# Altium PCB keycontrol.PcbDoc
Units mil, origin at the board's own origin, x right, y up, seen from the top; angles counter-clockwise.
Board outline 5505 x 5380 mil, 2 copper layers (Top Layer, Bottom Layer); 147 components, 95 nets, 404 pads, 100 vias.
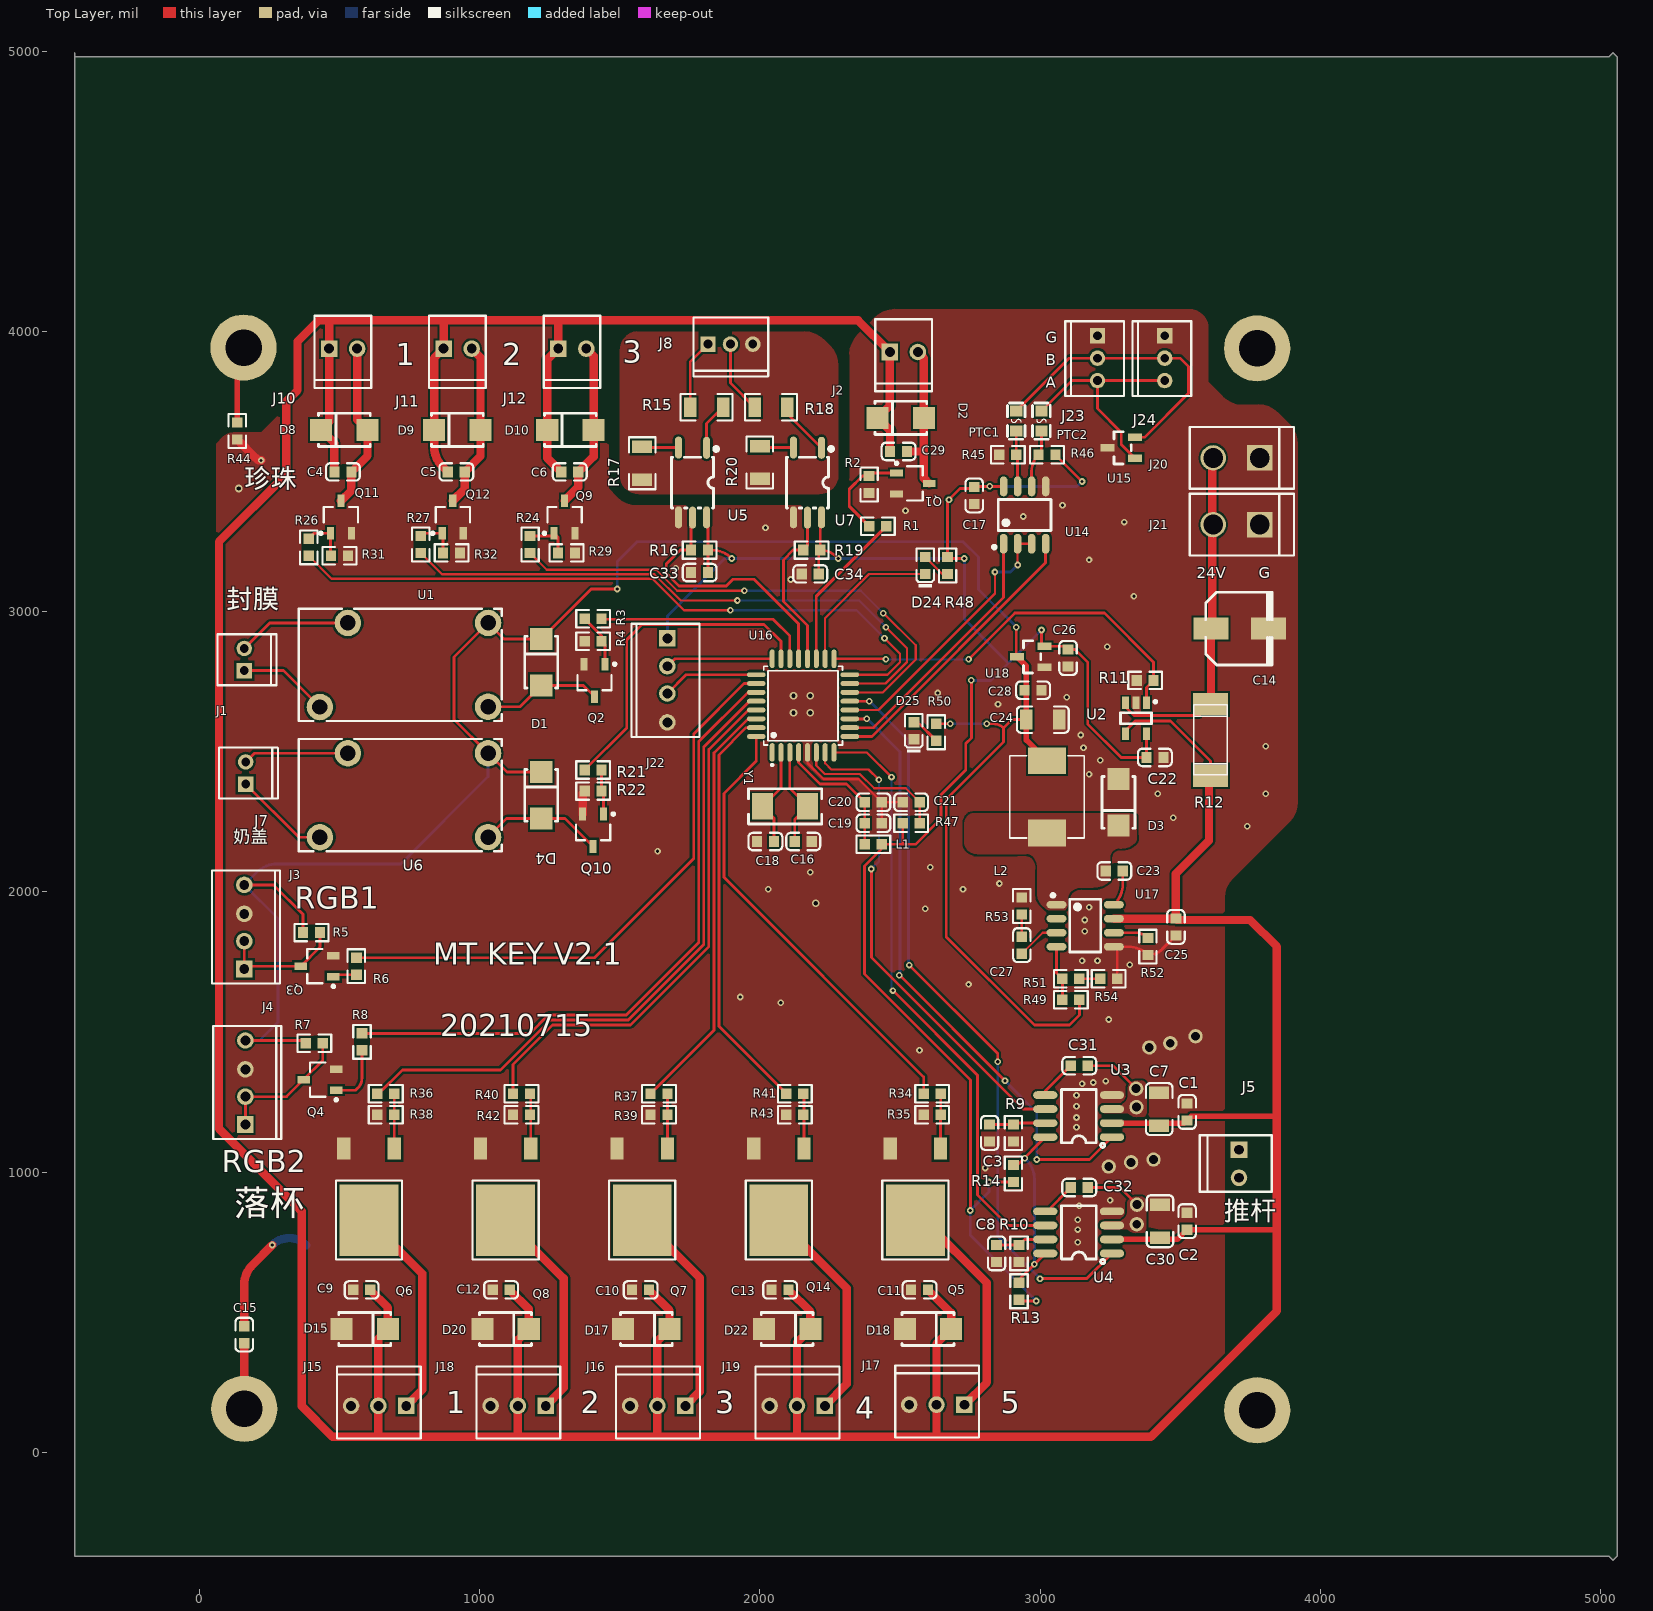
[diagram p0: Top Layer view]
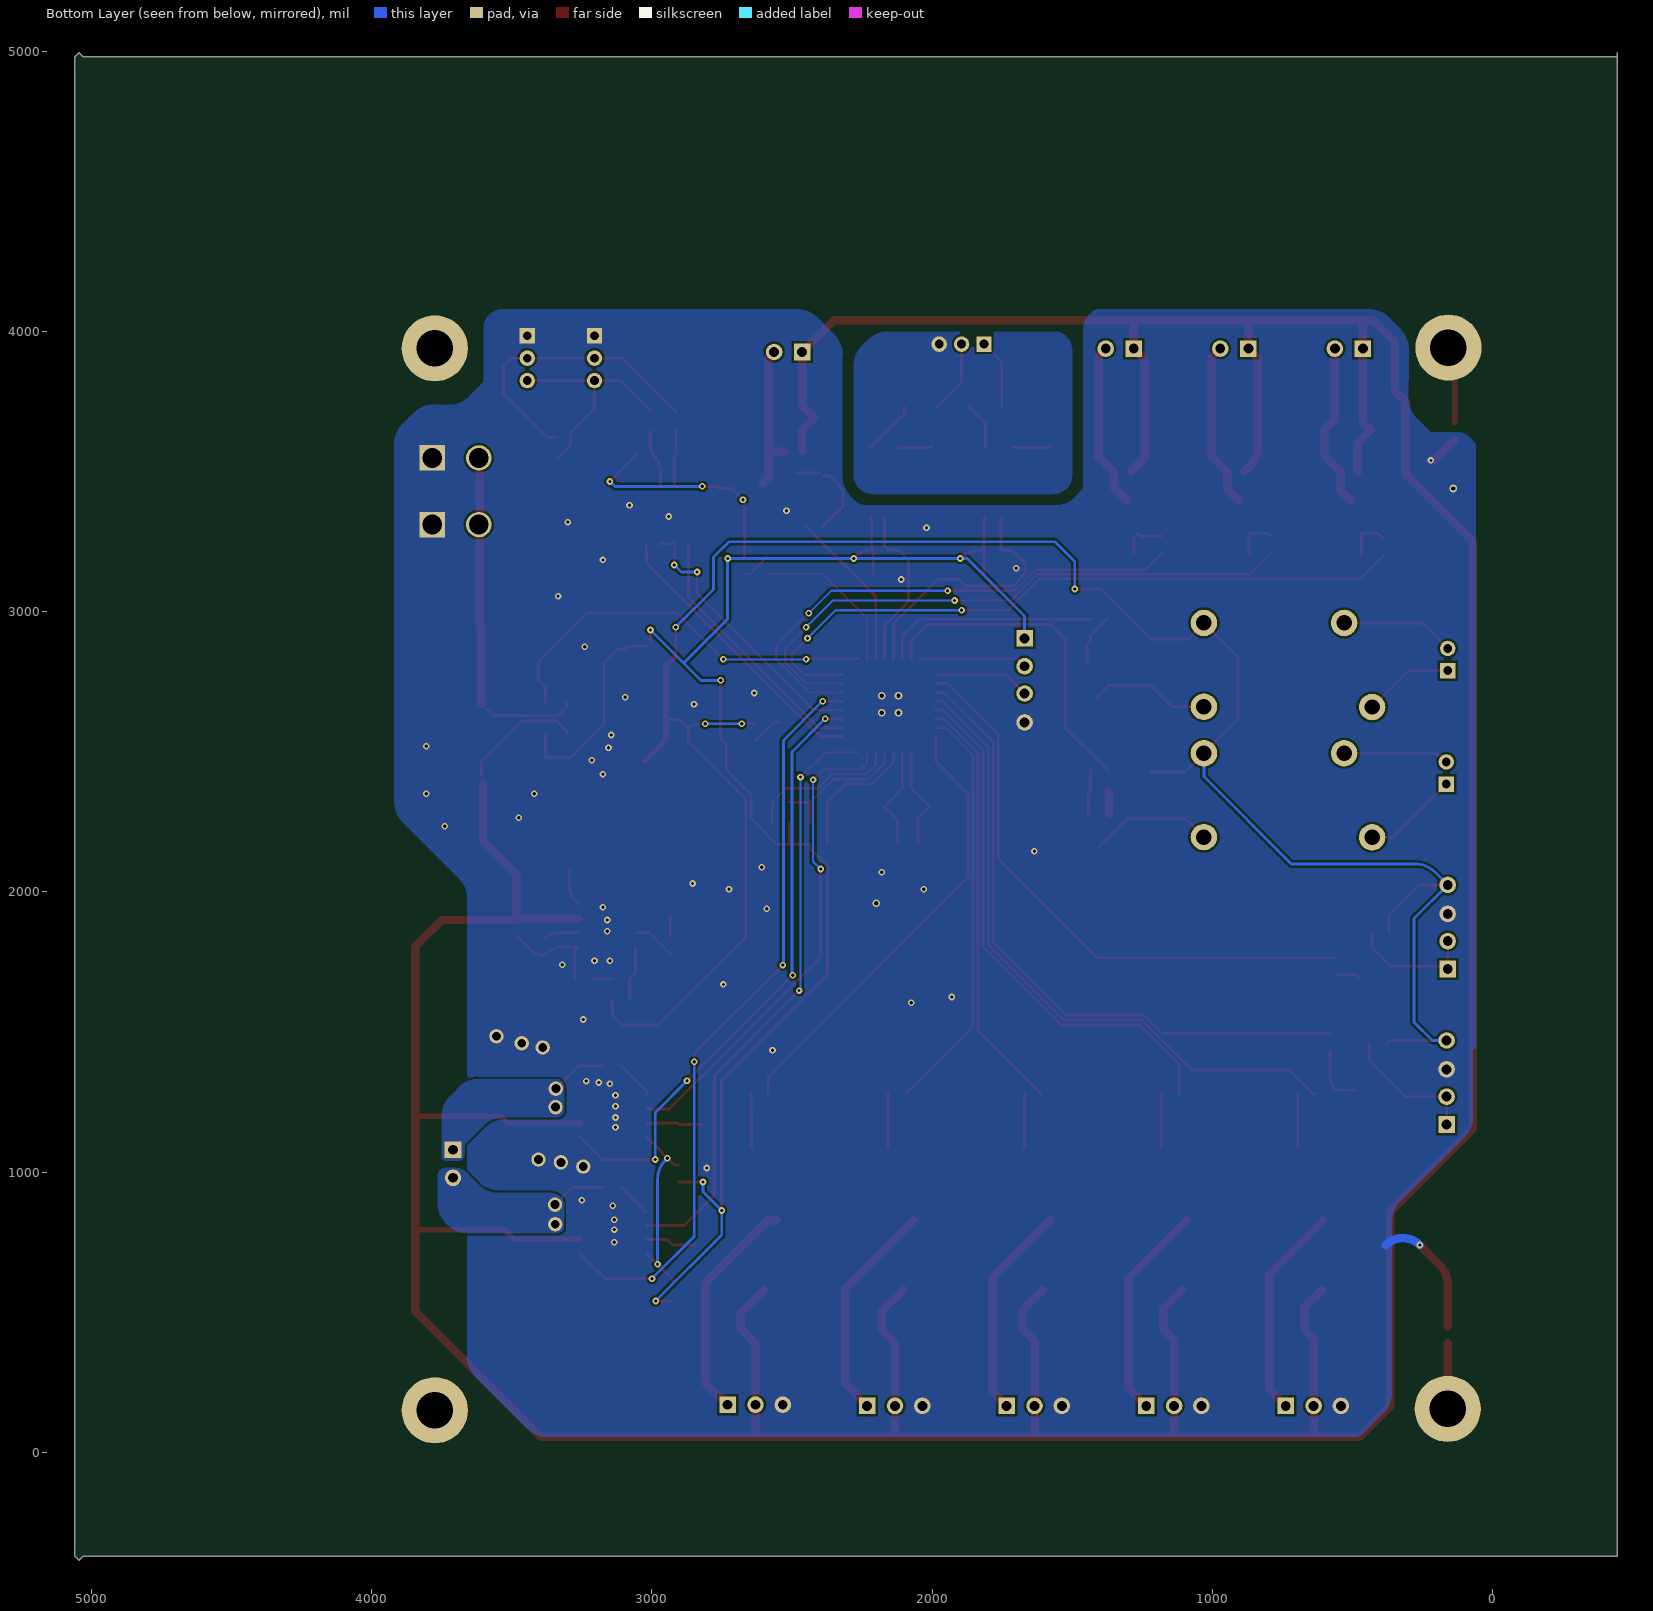
[diagram p1: Bottom Layer view, seen from below]
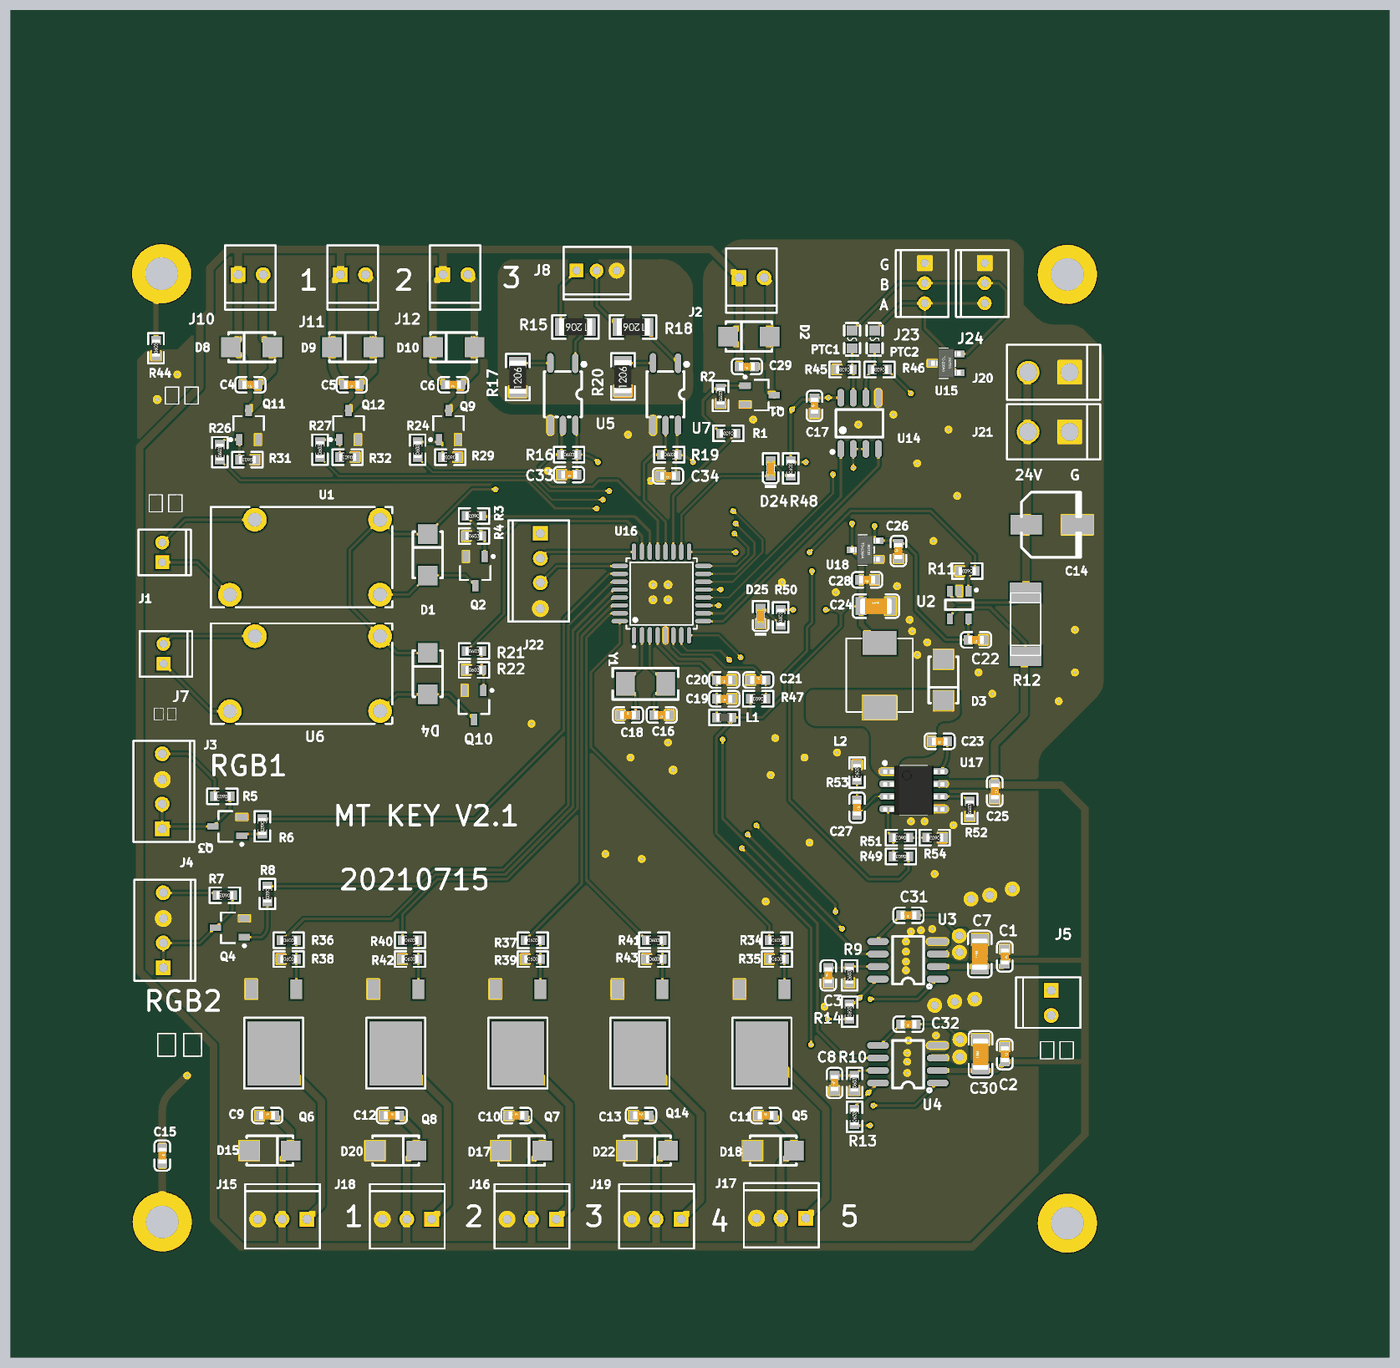
[diagram p2: 3D render of the assembled board from above, using the file's embedded part models]

## Layer stack, top to bottom
Top Layer: signal copper 1.4
Dielectric: dielectric 12.6, FR-4, Dk 4.8
Bottom Layer: signal copper 1.4

## Board outline
-445,4995 -445,-370 5030,-370 5045,-385 5060,-370 5060,4490 5060,4980 5045,4995 5030,4980 -445,4980

## Design rules (kind name [scope] priority, off if disabled: settings)
Clearance [All] p1: gap=8
PolygonConnect [All] p1: connectstyle=Direct reliefconductorwidth=10 reliefentries=4 polygonreliefangle="90 Angle"
RoutingVias [All] p1: holewidth=28 width=50 viastyle="Through Hole" minholewidth=11.81 minwidth=23.62 maxholewidth=11.81 maxwidth=23.62
SilkscreenOverComponentPads [All] p1: minsilkscreentomaskgap=10
SolderMaskExpansion [All] p1: expansion=4
Width [All] p1: maxlimit=50 minlimit=8 preferedwidth=10
27 further rules are at their usual default settings.

## Classes and differential pairs
component class keycontrol2: C1 C2 C3 C7 C8 C30 C31 C32 J5 R9 R10 R13 R14 U3 U4
component class keycontrol: C4 C5 C6 C9 C10 C11 C12 C13 D8 D9 D10 D15 D17 D18 D20 D22 J10 J11 J12 J15 J16 J17 J18 J19 Q5 Q6 Q7 Q8 Q9 Q11 Q12 Q14 R24 R26 R27 R29 R31 R32 R34 R35 R36 R37 R38 R39 R40 R41 R42 R43
component class keycontrol_MCU: C14 C15 C16 C17 C18 C19 C20 C21 C22 C23 C24 C25 C26 C27 C28 D3 D24 D25 J20 J21 J22 J23 J24 L1 L2 PTC1 PTC2 R11 R12 R44 R45 R46 R47 R48 R49 R50 R51 R52 R53 R54 U2 U14 U15 U16 U17 U18 Y1
component class keycontrol1: C29 C33 C34 D1 D2 D4 J1 J2 J3 J4 J7 J8 Q1 Q2 Q3 Q4 Q10 R1 R2 R3 R4 R5 R6 R7 R8 R15 R16 R17 R18 R19 R20 R21 R22 U1 U5 U6 U7

## Components (designator, comment, footprint, x,y, rotation, side; value= is the part's Value field where it differs from the comment)
C1 "100nF (104) 10% 50V" 0603_C 3525,1215 r270 top
C2 "100nF (104) 10% 50V" 0603_C 3525,825 r270 top
C3 "1uF (105) 10% 50V" 0603_C 2820,1140 r90 top
C4 "100nF (104) 10% 50V" 0603_C 512,3499 r180 top
C5 "100nF (104) 10% 50V" 0603_C 916.75,3499 r180 top
C6 "100nF (104) 10% 50V" 0603_C 1321.5,3499 r180 top
C7 "10uF (106) 10% 50V" 1206_C 3425,1225 r90 top
C8 "1uF (105) 10% 50V" 0603_C 2845,710 r90 top
C9 "100nF (104) 10% 50V" 0603_C 579,580 r0 top
C10 "100nF (104) 10% 50V" 0603_C 1574.5,580 r0 top
C11 "100nF (104) 10% 50V" 0603_C 2570,580 r0 top
C12 "100nF (104) 10% 50V" 0603_C 1076.75,580 r0 top
C13 "100nF (104) 10% 50V" 0603_C 2072.25,580 r0 top
C14 "100uf" E_6.3*5.4 3610,2940 r0 top
C15 "100nF" 0603_C 160,420 r270 top
C16 "22pF" 0603_C 2155,2180 r180 top
C17 "100nF (104) 10% 50V" 0603_C 2765,3415 r90 top
C18 "22pF" 0603_C 2020,2180 r0 top
C19 "10uF" 0603_C 2405,2245 r180 top
C20 "100nF" 0603_C 2405,2320 r180 top
C21 "10nF" 0603_C 2540,2320 r0 top
C22 "100nF (104) 10% 50V" 0603_C 3410,2480 r180 top
C23 "100nF" 0603_C 3265,2075 r180 top
C24 "22u/25V" 1206_C 3010,2615 r0 top
C25 "1uF  50V" 0603_C 3485,1875 r270 top
C26 "100nF" 0603_C 3100,2835 r90 top
C27 "220pF" 0603_C 2935,1810 r270 top
C28 "10uF" 0603_C 2975,2720 r180 top
C29 "100nF (104) 10% 50V" 0603_C 2495,3572 r180 top
C30 "10uF (106) 10% 50V" 1206_C 3428,825 r90 top
C31 "100nF (104) 10% 50V" 0603_C 3140,1380 r180 top
C32 "100nF (104) 10% 50V" 0603_C 3140,945 r180 top
C33 "100nF (104) 10% 50V" 0603_C 1785,3140 r180 top
C34 "100nF (104) 10% 50V" 0603_C 2180,3135 r180 top
D1 "SS54" SMA(DO-214AC)_S1 1220,2820 r270 top
D2 "SS54" SMA(DO-214AC)_S1 2503,3692 r0 top
D3 "SS54" SMA(DO-214AC)_S1 3280,2320 r90 top
D4 "SS54" SMA(DO-214AC)_S1 1220,2345 r270 top
D8 "SS54" SMA(DO-214AC)_S1 517,3649 r0 top
D9 "SS54" SMA(DO-214AC)_S1 920.5,3649 r0 top
D10 "SS54" SMA(DO-214AC)_S1 1324,3649 r0 top
D15 "SS54" SMA(DO-214AC)_S1 590,440 r180 top
D17 "SS54" SMA(DO-214AC)_S1 1595,440 r180 top
D18 "SS54" SMA(DO-214AC)_S1 2600,440 r180 top
D20 "SS54" SMA(DO-214AC)_S1 1092.5,440 r180 top
D22 "SS54" SMA(DO-214AC)_S1 2097.5,440 r180 top
D24 "绿灯 0603" 0603_LED_S1 2590,3165 r90 top
D25 "红灯 0603" 0603_LED_S1 2549.68,2575 r90 top
J1 "MOTOR" PH2-2.0 160,2790 r90 top
J2 "MOTOR" XH-2P 2464,3927 r0 top
J3 "header4" xh-4 160,1725 r90 top
J4 "header4" xh-4 164,1170 r90 top
J5 "MOTOR" XH-2P 3710,1080 r270 top
J7 "MOTOR" PH2-2.0 165,2385 r90 top
J8 "PH-3" ph3-2.0 1815,3955 r0 top
J10 "MOTOR" XH-2P 463,3939 r0 top
J11 "MOTOR" XH-2P 871.75,3939 r0 top
J12 "MOTOR" XH-2P 1280.5,3939 r0 top
J15 "header3p" XH-3 738,166 r180 top
J16 "header3p" XH-3 1734,166 r180 top
J17 "header3p" XH-3 2730,170 r180 top
J18 "header3p" XH-3 1236,166 r180 top
J19 "header3p" XH-3 2232,166 r180 top
J20 "MOTOR" 5557_a 3784,3549 r180 top
J21 "MOTOR" 5557_a 3784,3311 r180 top
J22 "header4" xh-4 1670,2905 r270 top
J23 "PH-3" ph3-2.0 3205,3985 r270 top
J24 "PH-3" ph3-2.0 3445,3985 r270 top
L1 "10nH ±5%" 0603_L 2405,2170 r180 top
L2 "15uH" LSMD,3.3*6.6*3mm 3025,2210 r90 top
PTC1 "PTC" PTC 2915,3645 r90 top
PTC2 "PTC" PTC 3005,3645 r90 top
Q1 "AO3400A N道沟 X0YV1T SOT-23" SOT-23-3L 2546,3458 r180 top
Q2 "AO3400A N" SOT-23-3L 1410,2755 r90 top
Q3 "AO3400A N道沟 X0YV1T SOT-23" SOT-23-3L 420,1735 r0 top
Q4 "AO3400A N道沟 X0YV1T SOT-23" SOT-23-3L 430,1330 r0 top
Q5 "MOSFET_N" TO-252-2 2645,1085 r180 top
Q6 "MOSFET_N" TO-252-2 695,1085 r180 top
Q7 "MOSFET_N" TO-252-2 1670,1085 r180 top
Q8 "MOSFET_N" TO-252-2 1182.5,1085 r180 top
Q9 "AO3400A N道沟 X0YV1T SOT-23" SOT-23-3L 1303.29,3338 r270 top
Q10 "AO3400A N" SOT-23-3L 1405,2220 r90 top
Q11 "AO3400A N道沟 X0YV1T SOT-23" SOT-23-3L 505,3338 r270 top
Q12 "AO3400A N道沟 X0YV1T SOT-23" SOT-23-3L 904.14,3338 r270 top
Q14 "MOSFET_N" TO-252-2 2157.5,1085 r180 top
R1 "33Ω (33R0) ±1%" 0603_R 2421,3305 r180 top
R2 "4.7KΩ (4701) ±1%" 0603_R 2390,3454 r90 top
R3 "33Ω (33R0) ±1%" 0603_R 1405,2975 r180 top
R4 "10KΩ (1002) ±1%" 0603_R 1405,2895 r0 top
R5 "470Ω (4700) ±1%" 0603_R 400,1855 r180 top
R6 "27Ω (27R0) ±1%" 0603_R 560,1735 r270 top
R7 "470Ω (4700) ±1%" 0603_R 410,1460 r180 top
R8 "27Ω (27R0) ±1%" 0603_R 580,1465 r270 top
R9 "27KΩ (2702) ±1%" 0603_R 2905,1140 r90 top
R10 "27KΩ (2702) ±1%" 0603_R 2925,710 r90 top
R11 "68KΩ (6802) ±1%" 0603_R 3375,2755 r180 top
R12 "R005/2W" 2512 3625,2605 r270 top
R13 "4.7KΩ (4701) ±1%" 0603_R 2925,575 r90 top
R14 "4.7KΩ (4701) ±1%" 0603_R 2905,995 r90 top
R15 "1KΩ (1001) ±1%" 1206_R 1810,3730 r180 top
R16 "330Ω (3300) ±1%" 0603_R 1785,3220 r0 top
R17 "1KΩ (1001) ±1%" 1206_R 1580,3530 r90 top
R18 "1KΩ (1001) ±1%" 1206_R 2040,3730 r180 top
R19 "330Ω (3300) ±1%" 0603_R 2185,3220 r0 top
R20 "1KΩ (1001) ±1%" 1206_R 2000,3532.71 r90 top
R21 "33Ω (33R0) ±1%" 0603_R 1405,2435 r0 top
R22 "10KΩ (1002) ±1%" 0603_R 1405,2360 r0 top
R24 "33Ω (33R0) ±1%" 0603_R 1180,3240 r90 top
R26 "33Ω (33R0) ±1%" 0603_R 390,3230 r90 top
R27 "33Ω (33R0) ±1%" 0603_R 790,3240 r90 top
R29 "4.7KΩ (4701) ±1%" 0603_R 1310,3210 r180 top
R31 "4.7KΩ (4701) ±1%" 0603_R 500,3200 r180 top
R32 "4.7KΩ (4701) ±1%" 0603_R 900,3210 r180 top
R34 "33Ω (33R0) ±1%" 0603_R 2615,1280 r0 top
R35 "10KΩ (1002) ±1%" 0603_R 2615,1205 r0 top
R36 "33Ω (33R0) ±1%" 0603_R 665,1280 r0 top
R37 "33Ω (33R0) ±1%" 0603_R 1640,1280 r0 top
R38 "10KΩ (1002) ±1%" 0603_R 665,1205 r0 top
R39 "10KΩ (1002) ±1%" 0603_R 1640,1205 r0 top
R40 "33Ω (33R0) ±1%" 0603_R 1149.68,1280 r0 top
R41 "33Ω (33R0) ±1%" 0603_R 2125,1280 r0 top
R42 "10KΩ (1002) ±1%" 0603_R 1149.68,1205 r0 top
R43 "10KΩ (1002) ±1%" 0603_R 2125,1205 r0 top
R44 "1MΩ (1004) ±1%" 0603_R 135,3645 r90 top
R45 "4.7KΩ (4701) ±1%" 0603_R 2885,3560 r180 top
R46 "4.7KΩ (4701) ±1%" 0603_R 3025,3560 r180 top
R47 "10KΩ" 0603_R 2540,2245 r180 top
R48 "1KΩ" 0603_R 2670,3165 r90 top
R49 "120KΩ" 0603_R 3110,1615 r180 top
R50 "10KΩ" 0603_R 2629.68,2570 r90 top
R51 "22KΩ" 0603_R 3110,1690 r180 top
R52 "120KΩ" 0603_R 3385,1805 r90 top
R53 "120KΩ (1203) ±1%" 0603_R 2935,1950 r90 top
R54 "470Ω" 0603_R 3245,1690 r180 top
U1 "HF32F/005-HS" HF32F/005-HS 1030,2960 r180 top
U2 "INA138" SOT-23-5 3380,2675 r90 top
U3 "MP8040" SOIC-8_150mil#1 3155,1180 r180 top
U4 "MP8040" SOIC-8_150mil#1 3155,765 r180 top
U5 "TLP2362" SO-5 1810,3585 r270 top
U6 "HF32F/005-HS" HF32F/005-HS 1030,2495 r180 top
U7 "TLP2362" SO-5 2220,3585 r270 top
U14 "SP3485EN-L/TR" SOIC-8_150mil#2 2945,3345 r0 top
U15 "PESD3V3L2BT" SOT-23(SOT-23-3) 3290,3585 r0 top
U16 "STM32G030K8T6" LQFP-32 2044,2498 r0 top
U17 "MP2560D" SOP-8_150mil 3175,1915 r270 top
U18 "MCP1700T-3302E/TT" SOT-23-3 2995,2840 r0 top
Y1 "8MHz" SMD-5032_2P 2090,2305 r0 top

## Footprints (in the part's own frame and the unit in brackets; to place one, negate y for a bottom-side part, rotate by r counter-clockwise, add the part's x,y. Pads: shape width x height; smd on the part's side, far side on the other; paste and mask are expansions set on the pad)
0603_C [mm]
  rect 0.93x0.98 smd: 1(-0.77,0) 2(0.77,0)
  silkscreen extent -1.53,-0.79 1.54,0.79, body extent -0.8,-0.4 0.8,0.4, height 0.3
0603_L [mm]
  rect 0.93x0.98 smd: 1(-0.77,0) 2(0.77,0)
  silkscreen extent -1.53,-0.79 1.54,0.79, body extent -0.82,-0.41 0.83,0.41, height 0.46
0603_LED_S1 [mm]
  rect 0.93x0.98 smd: A(0.77,0) K(-0.77,0)
  silkscreen extent -1.98,-0.79 1.54,0.79, body extent -0.8,-0.4 0.8,0.4, height 0.6
0603_R [mm]
  rect 0.93x0.98 smd: 1(-0.77,0) 2(0.77,0)
  silkscreen extent -1.53,-0.79 1.54,0.79, body extent -0.85,-0.4 0.85,0.4, height 0.56
1206_C [mm]
  rect 1.13x1.8 smd: 1(-1.49,0) 2(1.49,0)
  silkscreen extent -2.36,-1.2 2.35,1.2, body extent -1.6,-0.81 1.6,0.79, height 1
1206_R [mm]
  rect 1.13x1.8 smd: 1(-1.49,0) 2(1.49,0)
  silkscreen extent -2.36,-1.2 2.35,1.2, body extent -1.7,-0.86 1.65,0.87, height 0.85
2512 [mil]
  rect 78.7x126 smd: 1(-65.65,-17) 2(190.35,-17)
  silkscreen extent -63,-77 187,43
5557_a [mm]
  rect 2.3x2.3 hole 1.8: 1(0,0)
  round 2.3 hole 1.8: 2(4.216,0)
  silkscreen extent -3.1,-2.79 6.35,2.79
E_6.3*5.4 [mm]
  rect 3.2x2 smd: 1(0,0) 2(5.207,0)
  silkscreen extent -0.47,-3.3 5.53,3.3
HF32F/005-HS [mil]
  round 94.49 hole 55.12: 1(0,0) 2(0,299.2) 3(600,300) 4(500,0)
  silkscreen extent -49,-51 676,350
LQFP-32 [mm]
  oval 0.448x1.684 smd: 1(0,0) 2(0.8,0) 3(1.6,0) 4(2.4,0) 5(3.2,0) 6(4,0) 7(4.8,0) 8(5.6,0) 17(5.6,8.484) 18(4.8,8.484) 19(4,8.484) 20(3.2,8.484) 21(2.4,8.484) 22(1.6,8.484) 23(0.8,8.484) 24(0,8.484)
  oval 1.684x0.448 smd: 9(7.042,1.442) 10(7.042,2.242) 11(7.042,3.042) 12(7.042,3.842) 13(7.042,4.642) 14(7.042,5.442) 15(7.042,6.242) 16(7.042,7.042) 25(-1.442,7.042) 26(-1.442,6.242) 27(-1.442,5.442) 28(-1.442,4.642) 29(-1.442,3.842) 30(-1.442,3.042) 31(-1.442,2.242) 32(-1.442,1.442)
  silkscreen extent -0.78,-1.24 6.38,7.82
LSMD,3.3*6.6*3mm [mm]
  rect 2.424x3.42 smd: 1(0,0) 2(6.556,0)
  silkscreen extent -0.45,-3.38 7,3.38
PH2-2.0 [mm]
  rect 1.4x1.4 hole 0.8: 1(0,0)
  round 1.4 hole 0.8: 2(2.007,0)
  silkscreen extent -1.32,-2.92 3.3,2.41
ph3-2.0 [mm]
  rect 1.4x1.4 hole 0.8: 1(0,0)
  round 1.4 hole 0.8: 2(2.032,0) 3(4.064,0)
  silkscreen extent -1.32,-2.92 5.46,2.41
PTC [mm]
  rect 1x1.1 smd: 1(0,0) 2(1.8,0)
  silkscreen extent -0.75,-0.8 2.55,0.8
SMA(DO-214AC)_S1 [mm]
  rect 2x2 smd: 1(2.1,0) 2(-2.1,0)
  silkscreen extent -2.35,-1.5 2.35,1.5
SMD-5032_2P [mm]
  rect 1.9x2.4 smd: 1(-2.05,0) 2(2.05,0)
  silkscreen extent -3.32,-1.6 3.32,1.6
SO-5 [mm]
  oval 2x0.65 smd: 1(0,0) 3(-0.025,-2.54) 4(6.3,-2.54) 5(6.325,-1.27) 6(6.3,0)
  silkscreen extent -0.05,-3.17 5.45,1.02
SOIC-8_150mil#1 [mm]
  oval 2.2x0.7 smd: 1(-2.583,1.397) 2(-2.583,0.127) 3(-2.583,-1.143) 4(-2.583,-2.413) 5(3.462,-2.413) 6(3.462,-1.143) 7(3.462,0.127) 8(3.462,1.397)
  silkscreen extent -1.94,-2.92 1.99,2.32
SOIC-8_150mil#2 [mm]
  oval 0.7x1.8 smd: 1(-1.905,-2.6) 2(-0.635,-2.6) 3(0.635,-2.6) 4(1.905,-2.6) 5(1.905,2.6) 6(0.635,2.6) 7(-0.635,2.6) 8(-1.905,2.6)
  silkscreen extent -2.9,-3.05 2.4,1.4
SOP-8_150mil [mm]
  oval 0.7x1.8 smd: 1(-1.008,-2.949) 2(0.262,-2.949) 3(1.532,-2.949) 4(2.802,-2.949) 5(2.802,2.251) 6(1.532,2.251) 7(0.262,2.251) 8(-1.008,2.251)
  silkscreen extent -2,-3.42 3.3,1.05, body extent -1.6,-3.45 3.4,2.75, height 1.75
SOT-23(SOT-23-3) [mm]
  rect 1.25x0.7 smd: 1(1.25,-0.95) 2(1.25,0.95) 3(-1.25,0)
  silkscreen extent -0.65,-1.46 0.9,1.46, body extent -1.5,-1.5 1.5,1.5, height 1.3
SOT-23-3 [mm]
  rect 1.25x0.7 smd: 1(0.534,-0.969) 2(0.534,0.931) 3(-1.966,-0.019)
  silkscreen extent -1.37,-1.48 0.18,1.44, body extent -2.22,-1.52 0.78,1.48, height 1.3
SOT-23-3L [mm]
  rect 1.15x0.65 smd: 1(1.475,-0.95) 2(1.475,0.95) 3(-1.475,0)
  silkscreen extent -0.9,-1.95 1.6,1.55, body extent -0.9,-1.55 0.9,1.55, height 1.25
SOT-23-5 [mm]
  rect 1.1x0.6 smd: 1(0,0) 2(0,0.95) 3(0,1.9) 4(-2.8,1.9) 5(-2.8,0)
  silkscreen extent -1.9,-0.93 0.22,2.35
TO-252-2 [mm]
  rect 1.2x2 smd: 1(0,0) 3(4.56,0)
  rect 5.334x6.477 smd: 2(2.28,6.525)
  silkscreen extent -0.72,2.91 5.28,10.08
XH-2P [mm]
  rect 1.5x1.5 hole 0.9: 1(0,0)
  round 1.5 hole 0.9: 2(2.54,0)
  silkscreen extent -1.32,-3.56 3.81,2.97
XH-3 [mm]
  rect 1.5x1.5 hole 0.9: 1(0,0)
  round 1.5 hole 0.9: 2(2.525,0) 3(5,0)
  silkscreen extent -1.32,-3.56 6.27,2.97
xh-4 [mm]
  rect 1.5x1.5 hole 0.9: 1(0,0)
  round 1.5 hole 0.9: 2(2.525,0) 3(5,0) 4(7.62,0)
  silkscreen extent -1.32,-3.25 8.94,2.92

## Part data
C1 C2 C4 C5 C6 C9 C10 C11 C12 C13 C15 C17 C20 C22 C23 C26 C29 C31 C32 C33 C34: library part "0603 100nF (104) 10% 50V", "Ì"
C3 C8 C25: library part "0603 1uF (105) 10% 50V", "Ì"
C7 C30: library part "1206 10uF (106) 10% 50V", "Ì"
C16 C18: library part "0603 22pF (220) 5% 50V", "ÌùÆ"
C19 C28: library part "0603 10uF (106) 10% 10V", "Ì"
C21: library part "0603 10nF (103) 10% 50V", "Ì"
C24: library part "1206 220pF (221) 10% 50V", "Ì"
C27: library part "0603 220pF (221) 10% 50V", "Ì"
D1 D2 D3 D4: library part "SMA(DO-214AC) SS54"
D8 D9 D10 D15 D17 D18 D20 D22: library part "SMA(DO-214AC) SS54", "二"
D24: library part "0603 绿灯"
D25: library part "0603 红灯"
L1: library part "0603 10nH 5%", "Ì"
L2: library part induct, "YSPI"
Q1 Q3 Q4 Q9 Q11 Q12: "MOS("
Q2: library part "AO3400A N道沟 X0YV1T SOT-23", "MOS("
Q10: library part "AO3400A N道沟 X0YV1T SOT-23", "MOS(场效应管)"
R1 R3 R21 R24 R26 R27 R34 R36 R37 R40 R41: library part "0603 33Ω (33R0) 1%"
R2 R13 R14 R29 R31 R32 R45 R46: library part "0603 4.7KΩ (4701) 1%"
R4 R22 R35 R38 R39 R42 R43 R47 R50: library part "0603 10KΩ (1002) 1%"
R5 R7 R54: library part "0603 470Ω (4700) 1%"
R6 R8: library part "0603 27Ω (27R0) 1%"
R9 R10: library part "0603 27KΩ (2702) 1%"
R11: library part "0603 68KΩ (6802) 1%"
R15 R17 R18 R20: library part "1206 1KΩ (1001) 1%"
R16 R19: library part "0603 330Ω (3300) 1%"
R44: library part "0603 1MΩ (1004) 1%"
R48: library part "0603 1KΩ (1001) 1%"
R49 R52 R53: library part "0603 120KΩ (1203) 1%"
R51: library part "0603 22KΩ (2202) 1%"
U3 U4: library part MP8040DN-LF-Z, "half bridge pow"
U14: library part SP3485EN-L/TR_[C8963], "RS-485/RS-42"
U15: library part PSM712-LF-T7_[C32677]
U17: "MP2560D_SOIC-8_"
U18: library part "MCP1700T-3302E/TT LDO 3.3V", "https://item.szlcsc.com/40034.html"
Y1: library part "SMD-5032_2P 8MHz 20ppm 20pF", "ÌùÆ"

## Free pads (board coordinates)
  round 236.22 hole 129.92: 0(157.48,3942.52) 0(160,155) 0(3775,150) 0(3775,3940)
  round 51.18 hole 31.5: 1(3344,1232) 2(3343,1298) 3(3345,814) 4(3346,884) 6(3325,1035) 7(3405,1045) 8(3245,1020) 9(3390,1445) 10(3465,1460) 11(3555,1485)

## Via types
v1: diameter 23.62, hole 11.81, Top Layer to Bottom Layer, 94 vias
v2: diameter 27.56, hole 15.75, Top Layer to Bottom Layer, 6 vias

## Nets (pads, with @x,y where several pads share a name; then routed paths per layer and width w, separated by ;. In a path a pad name is that pad's centre, name@x,y a point inside that pad or via, vN(x,y) a via of type N, cw(c..) or ccw(c..) an arc to the next point about the centre after c; other vN are vias at no path point)
485_A: J23.3 J24.3 PTC2.2 U15.1 | length 818.2
  Top Layer w10: PTC2.2 3114.13,3825 J23.3 ; U15.1 3290,3596.81 3290,3640 3205,3725 J23.3 ; J24.3 J23.3
485_B: J23.2 J24.2 PTC1.2 U15.2 | length 1056.8
  Top Layer w10: PTC1.2 3104.13,3905 J23.2 J24.2 3500,3905 3530,3875 3530,3780 3372.4,3622.4 U15.2
485_DIR: U14.2 U14.3 U16.12 | length 984
  Top Layer w8: U16.12 2423.26,2649.26 2839,3065 v1(2839,3142) ; v1(2920,3167) U14.2 U14.3
  Bottom Layer w10: v1(2839,3142) 2895,3142 v1(2920,3167)
CEN1: R36.1 U16.28 | length 2345.6
  Top Layer w10: R36.1 639.33,1280 724.33,1365 1074.54,1365 1252.54,1543 1530.54,1543 1800,1812.46 1800,2517.22 1963.54,2680.76 U16.28
CEN2: R40.1 U16.29 | length 1908
  Top Layer w10: R40.1 1119.37,1384.37 1260,1525 1538,1525 1818,1805 1818,2508 1959.26,2649.26 U16.29
CEN3: R37.1 U16.30 | length 1511.7
  Top Layer w10: R37.1 1836,1506.31 1836,2496.46 1957.31,2617.76 U16.30
CEN4: R41.1 U16.31 | length 1482.2
  Top Layer w10: U16.31 1951.27,2586.27 1854,2489 1854,1520.69 R41.1
CEN5: R34.1 U16.32 | length 1617.7
  Top Layer w10: U16.32 1987.23,2466.68 1872,2351.46 1872,2052.54 2584.69,1339.86 R34.1
CURR: R11.1 U2.1 U16.17 | length 1437.8
  Top Layer w10: U16.17 2447.98,2832.02 v1(2450,2830) ; v1(2745,2830) 2910,2995 3230,2995 3405.31,2819.69 R11.1 3380,2729.69 U2.1
  Bottom Layer w8: v1(2450,2830) v1(2745,2830)
EN1: U3.6 U16.7 | length 1745.1
  Top Layer w8: U16.7 2232.98,2459.34 2255,2437.31 2387.69,2437.31 v1(2425,2400)
  Top Layer w10: v1(2398,2082) 2398,1766.23 2939.23,1225 U3.6
  Bottom Layer w8: v1(2398,2082) 2425,2109 v1(2425,2400)
EN2: U4.6 U16.8 | length 2147.6
  Top Layer w8: U16.8 2382,2498 v1(2470,2410)
  Top Layer w10: v1(2475,1648) 2777,1346 2777,918 2885,810 U4.6
  Bottom Layer w8: v1(2470,2410) 2470,1653 v1(2475,1648)
F\A\U\L\T\: R13.2 R14.2 U3.8 U4.8 | length 687.4
  Top Layer w10: R14.2 2919.01,1025.32 U3.8 ; R13.2 2925,616.31 v1(2980,671.31) U4.8
  Bottom Layer w10: v1(2945,1050) 2950.71,1044.29 cw(c2880,973.58) 2980,973.58 v1(2980,671.31)
GND: C1.1 C2.1 C3.1 C7.2 C8.1 C9.1 C10.1 C11.1 C12.1 C13.1 C14.2 C15.1 C16.1 C17.1 C18.1 C19.1 C20.1 C21.1 C22.1 C24.2 C25.2 C26.1 C28.1 C30.2 C33.2 C34.2 D3.1 D15.1 D17.1 D18.1 D20.1 D22.1 D25.K J3.3 J4.3 J15.3 J16.3 J17.3 J18.3 J19.3 J20.1 J21.1 J22.4 J23.1 J24.1 pad.6 pad.7 pad.8 pad.9 pad.10 pad.11 Q1.2 Q2.2 Q3.2 Q4.2 Q5.3 Q6.3 Q7.3 Q8.3 Q9.2 Q10.2 Q11.2 Q12.2 Q14.3 R2.1 R4.1 R9.1 R10.1 R11.2 R22.1 R29.1 R31.1 R32.1 R35.1 R38.1 R39.1 R42.1 R43.1 R44.1 R45.2 R52.1 R53.2 R54.1 U2.2 U3.4 U4.4 U5.4 U7.4 U14.5 U15.3 U16.5 U17.5 U18.1 | length 1548.3
  Top Layer w8: U16.5 2169.98,2460.02 2228,2402 2353.32,2402 C20.1 ; C19.1 C20.1 ; C21.1 C20.1
  Top Layer w10: R54.1 3275.31,1792.99 U17.5 3313.57,1804.69 cw(c3313.57,1704.69) 3384.28,1775.4 R52.1 ccw(c3385,1847.11) 3436.21,1795.9 C25.2
  Top Layer w30: R44.1 202.39,3547.29 ccw(c220,3564.9) v1(220,3540) ; C15.1 160,598.58 cw(c260,598.58) 189.29,669.29 v1(260,740) ; Q10.2 1367.6,2352.91 R22.1
  Bottom Layer w30: v1(260,740) cw(c320.36,679.64) 382.17,738.5
  other v1: 3135,750 3135,795 3135,830 3140,880 3250,900 2805,1015 3130,1160 3130,1195 3130,1235 3130,1275 3150,1315 3190,1320 3235,1325 2570,1435 3245,1545 2075,1605 1930,1625 2745,1670 3320,1740 3150,1755 3205,1755 3160,1860 3160,1900 2590,1940 3175,1945 2030,2010 2725,2010 2855,2030 2180,2070 2608,2088 1635,2145 3740,2235 3475,2265 3420,2350 3805,2350 3175,2420 3215,2470 3155,2515 3805,2520 3145,2560 2850,2670 3095,2695 2635,2710 3240,2875 3335,3055.32 2110,3115 1700,3155 3175,3185 2020,3300 3300,3320 2940,3340 2520,3360 3080,3380
  other v2: 2200,1960 2120,2640 2180,2640 2120,2700 2180,2700 140,3440
GND_S: J8.3 R17.1 R20.1
LED1: D24.K U16.18 | length 567.9
  Top Layer w8: U16.18 2232.98,2977.98 2389.69,3134.69 D24.K
LOCK: U16.1
M_OUT1: C31.1 J5.1 pad.1 pad.2 U3.3 | length 206.7
  Top Layer w10: C31.1 3261,1380 pad.2
M_OUT2: C32.1 J5.2 pad.3 pad.4 U4.3 | length 201
  Top Layer w10: C32.1 3285,945 pad.4
MILK: R21.1 U16.23 | length 1188.1
  Top Layer w10: R21.1 1525,2585.31 1525,2900 1580,2955 2015,2955 2075.5,2894.5 U16.23
NEEDLE: R1.1 U16.19 | length 576.5
  Top Layer w10: U16.19 2201.48,3055.17 R1.1
NetC3_2: C3.2 R9.2 U3.7 | length 200.6
  Top Layer w10: C3.2 R9.2 2909.68,1175 U3.7
NetC8_2: C8.2 R10.2 U4.7 | length 181.8
  Top Layer w10: C8.2 R10.2 2944.68,760 U4.7
NetC23_1: C23.1 U17.8 | length 129.1
  Top Layer w10: U17.8 3266.03,1957.1 ccw(c3195.31,2027.82) 3295.31,2027.82 C23.1
NetC23_2: C23.2 D3.2 L2.1 U17.1
NetC27_1: C27.1 R53.1 | length 79.4
  Top Layer w8: C27.1 R53.1
NetC27_2: C27.2 U17.3 | length 155
  Top Layer w8: C27.2 3010.01,1854.69 U17.3
NetC29_1: C29.1 D2.1 J2.2 Q1.3 | length 549.3
  Top Layer w30: C29.1 2577.68,3572 2585.68,3564 ; J2.2 2585.68,3905.32 D2.1 2585.68,3564 ; Q1.3 2585.68,3476.39 2585.68,3564
NetC31_2: C31.2 U3.5 | length 142.7
  Top Layer w10: U3.5 3018.69,1289.01 C31.2
NetC32_2: C32.2 U4.5 | length 126.2
  Top Layer w10: U4.5 3024.69,860 C32.2
NetD1_1: D1.1 Q2.3 U1.2 | length 428.4
  Top Layer w10: U1.2 1143.48,2660.8 D1.1 1369.61,2737.32 Q2.3
NetD4_1: D4.1 Q10.3 U6.2 | length 444.1
  Top Layer w10: U6.2 1096.52,2262.32 D4.1 1304.61,2262.32 Q10.3
NetD24_A: D24.A R48.1 | length 105.1
  Top Layer w8: D24.A 2650.63,3134.69 R48.1
NetD25_A: D25.A R50.1 | length 107.2
  Top Layer w10: D25.A 2564.05,2605.32 R50.1
NetJ1_1: J1.1 U1.3 | length 323.8
  Top Layer w10: J1.1 300,2790 U1.3
NetJ1_2: J1.2 U1.4 | length 407.7
  Top Layer w10: J1.2 251,2960 U1.4
NetJ3_1: J3.1 J3.2 Q3.3 R5.1 | length 453.8
  Top Layer w10: J3.2 J3.1 170,1735 Q3.3 430.31,1803.39 R5.1
NetJ4_1: J4.1 J4.2 Q4.3 R7.1 | length 490.8
  Top Layer w10: J4.1 J4.2 311.34,1269.41 Q4.3 440.31,1398.39 R7.1
NetJ7_1: J7.1 U6.3 | length 343.7
  Top Layer w10: J7.1 355,2195 U6.3
NetJ7_2: J7.2 U6.4 | length 377.8
  Top Layer w10: J7.2 196,2495 U6.4
NetJ15_1: J15.1 Q6.2 | length 764.3
  Top Layer w30: Q6.2 795,638.35 795,223 J15.1
NetJ16_1: J16.1 Q7.2 | length 768.1
  Top Layer w30: Q7.2 1785,623.35 1785,217 J16.1
NetJ17_1: J17.1 Q5.2 | length 815.3
  Top Layer w30: Q5.2 2586.89,828.11 2810,605 2810,250 J17.1
NetJ18_1: J18.1 Q8.2 | length 774.5
  Top Layer w30: Q8.2 1300,620.85 1300,230 J18.1
NetJ19_1: J19.1 Q14.2 | length 794.8
  Top Layer w30: Q14.2 2310,585.85 2310,244 J19.1
NetPTC1_1: PTC1.1 R45.1 U14.7 | length 199
  Top Layer w10: PTC1.1 2915,3560.31 R45.1 cw(c2904,3548.69) 2920,3548.69 U14.7
NetPTC2_1: PTC2.1 R46.2 U14.6 | length 207
  Top Layer w10: U14.6 2970,3500.41 cw(c3054.28,3500.41) R46.2 ccw(c2969.78,3584.9) 3005,3584.9 PTC2.1
NetQ1_1: Q1.1 R1.2 R2.2 | length 339.1
  Top Layer w10: R2.2 2366.32,3484.32 2319,3437 2319,3376.68 R1.2 ; R2.2@2401.09,3495.4 Q1.1
NetQ2_1: Q2.1 R3.2 R4.2 | length 192
  Top Layer w10: R3.2 1435.32,2914.37 R4.2 1447.4,2882.91 Q2.1
NetQ3_1: Q3.1 R6.2 | length 84.9
  Top Layer w10: Q3.1 485.16,1704.68 R6.2
NetQ4_1: Q4.1 R8.2 | length 218.9
  Top Layer w10: Q4.1 557.91,1292.6 565,1299.68 ccw(c528.79,1335.9) 580,1335.9 R8.2
NetQ5_1: Q5.1 R34.2 R35.2 | length 195.1
  Top Layer w10: Q5.1 2645,1204.68 R35.2 R34.2
NetQ6_1: Q6.1 R36.2 R38.2 | length 195.1
  Top Layer w10: Q6.1 695,1279.68 R36.2
NetQ7_1: Q7.1 R37.2 R39.2 | length 195.1
  Top Layer w10: Q7.1 1670,1279.68 R37.2
NetQ8_1: Q8.1 R40.2 R42.2 | length 196
  Top Layer w10: R40.2 1182.5,1277.5 Q8.1
NetQ9_1: Q9.1 R24.2 R29.2 | length 165.5
  Top Layer w10: R24.2 1256.27,3270.32 Q9.1 1279.68,3266.13 R29.2
NetQ10_1: Q10.1 R21.2 R22.2 | length 159.9
  Top Layer w10: R21.2 R22.2 1442.4,2352.91 Q10.1
NetQ11_1: Q11.1 R26.2 R31.2 | length 166.5
  Top Layer w10: R26.2 409.61,3279.93 Q11.1 467.6,3202.09 R31.2
NetQ12_1: Q12.1 R27.2 R32.2 | length 151.9
  Top Layer w10: R27.2 799.61,3279.93 Q12.1 869.68,3276.99 R32.2
NetQ14_1: Q14.1 R41.2 R43.2 | length 195.9
  Top Layer w10: R41.2 2157.5,1277.82 Q14.1
NetR15_1: R15.1 U5.1 | length 169.3
  Top Layer w10: U5.1 1810,3671.34 R15.1
NetR17_2: R17.2 U5.3 | length 131.1
  Top Layer w10: R17.2 1582.67,3585.99 U5.3
NetR18_1: R18.1 U7.1 | length 195.3
  Top Layer w10: R18.1 2098.66,3706.34 U7.1
NetR20_2: R20.2 U7.3 | length 122.2
  Top Layer w10: R20.2 2005.38,3585.99 U7.3
NetR49_2: R49.2 R51.2 U17.4 | length 198.3
  Top Layer w10: U17.4 3058.89,1710.8 R51.2 R49.2
NetR51_1: R51.1 R54.2 | length 74.4
  Top Layer w10: R51.1 R54.2
NetR52_2: R52.2 U17.6 | length 126.6
  Top Layer w10: U17.6 3338.22,1854.69 cw(c3338.22,1788.53) R52.2
NRST: C21.2 R47.1 U16.6 | length 545
  Top Layer w8: U16.6 2201.48,2451.15 2231.31,2421.31 2356.63,2421.31 2407.94,2370 2520.31,2370 C21.2 R47.1
OSC_IN: C18.2 U16.2 Y1.1 | length 362.4
  Top Layer w10: C18.2 2050.32,2263.98 Y1.1 2075.5,2371.2 U16.2
OSC_OUT: C16.2 U16.3 Y1.2 | length 363.5
  Top Layer w10: U16.3 2106.99,2368.72 Y1.2 2124.68,2258.98 C16.2
PAD0: pad.0@157.48,3942.52 R44.2 | length 273.2
  Top Layer w20: R44.2 135,3888.25 cw(c211.75,3888.25) pad.0@157.48,3942.52
PAD1: C15.2 pad.0@160,155 | length 234.7
  Top Layer w30: pad.0@160,155 C15.2
PWM1: U3.1 U16.11 | length 2190.4
  Top Layer w10: U16.11 2381.76,2617.76 v1(2382,2618) ; v1(2498,1703) v1(2875,1326) ; v1(2988,1045) 3176.69,1045 U3.1
  Bottom Layer w10: v1(2382,2618) 2500,2500 2500,1705 v1(2498,1703) v1@2498,1701 ; v1(2875,1326) 2988,1213 v1(2988,1045)
PWM2: U4.1 U16.13 | length 2677.1
  Top Layer w10: U16.13 2390.76,2680.76 v1(2391,2681) ; v1(2533,1739) 2849,1423 v1(2849,1394) ; v1(3000,620) 3166.69,620 U4.1
  Bottom Layer w10: v1(2391,2681) 2531,2541 2531,1741 v1(2533,1739) ; v1(2849,1394) 2849,771 v1(3000,620)
SEAL: R3.1 U16.22 | length 778.3
  Top Layer w10: R3.1 1437.31,2973 1572.54,2973 2047,2973 2106.99,2913.01 U16.22
SEAL_24V_SWITCH_1: J8.1 R15.2 | length 251.4
  Top Layer w10: R15.2 1751.34,3891.34 J8.1
SEAL_24V_SWITCH_2: J8.2 R18.2 | length 260.8
  Top Layer w10: J8.2 1895,3816.34 R18.2
SEAL_SWITCH_1: R16.1 U5.5 U16.21 | length 944.4
  Top Layer w10: U5.5@1754.69,3330.68 R16.1 1716,3220 1666,3170 1666,3138.04 1712.04,3092 1880,3092 1904,3116 1979.54,3116 2138.49,2957.06 U16.21
SEAL_SWITCH_2: R19.1 U7.5 U16.20 | length 596.1
  Top Layer w10: U16.20 2169.98,2951.02 2084,3037 2084,3185 2119,3220 R19.1 2169.99,3235.31 U7.5
SWCLK: J22.3 U16.25 | length 345
  Top Layer w10: J22.3 1737.09,2775.24 U16.25
SWDIO: J22.2 U16.24 | length 384.9
  Top Layer w10: J22.2 1696.43,2832.02 U16.24
USART2_RX: U14.1 U16.10 | length 933.2
  Top Layer w10: U16.10 2405.81,2586.27 2870,3050.46 U14.1
USART2_TX: U14.4 U16.9 | length 1023.3
  Top Layer w8: U14.4@3020,3211.21 U14.4
  Top Layer w10: U16.9 2399.77,2554.77 3020,3175 U14.4@3020,3211.21
VCC3V3: C17.2 C22.2 C26.2 C33.1 C34.1 J22.1 L1.1 R13.1 R14.1 R16.2 R19.2 R46.1 R47.2 R48.2 U2.5 U5.6 U7.6 U14.8 U18.2 | length 7355
  Top Layer w10: U5.6 1815.32,3331.66 R16.2 ; C33.1 R16.2 ; v1(1900,3190) 1899.29,3190.71 ccw(c1828.58,3120) 1828.58,3220 R16.2 ; C34.1 2210.32,3215 R19.2 ; U7.6 2215.32,3332.3 R19.2 ; v1(2280,3190) 2274.53,3195.47 ccw(c2215.32,3136.26) R19.2 ; R47.2 2509.68,2170.32 2510,2170 ; v1(2730,3190) 2675.32,3190 R48.2 2670,3395 v1(2675,3400) 2715,3440 2759.68,3440 C17.2 2767.05,3447.36 v1(2820,3447.36) U14.8 ; v1(2751,863) 2752,864 2752,1329 2373.19,1707.81 2373.19,2092.28 2435.31,2154.4 L1.1 2510,2170 ; v1(2755,2755) 2755,2550 2735,2530 2735,2435 2647,2347 2647,2262 2555,2170 2510,2170 ; v1(2818,965) 2818.31,964.69 R14.1 ; R13.1@2929.69,540 v1(2987,540) ; U18.2@3005,2887.68 v1(3005,2935) ; U18.2 3088.66,2876.65 C26.2 3124.69,2865.32 3170,2820 3170,2600 3290,2480 C22.2 3379.69,2564.45 U2.5 ; R46.1 3150,3465.31 v1(3150,3465)
  Bottom Layer w10: J22.1 1670,2985 1875,3190 v1(1900,3190) v1(2730,3190) 2730,2973 2885,2818 ; v1(2755,2755) 2825,2755 v1(3005,2935) ; v1(2818,965) 2818,930 v1(2751,863) 2751,776 v1(2987,540) v1@2987,539 ; v1(2820,3447.36) 3132.36,3447.36 v1(3150,3465) v1@3150,3460
VCC5V: C24.1 C28.2 D1.2 D4.2 J3.4 J4.4 L2.2 R5.2 R7.2 R49.1 R50.2 U1.1 U6.1 U18.3 | length 7795.3
  Top Layer w10: J3.4 265,2025 369.68,1920.32 R5.2 ; J4.4 369.68,1470 R7.2 ; D4.2 1097.32,2427.68 U6.1 909,2616 909,2839 U1.1 1087.32,2902.68 D1.2 1398.32,3081 v1(1491,3081) ; R50.2 2679.68,2600.32 v1(2680,2600) ; v1(2810,2600) 2833.79,2600 cw(c2833.79,2548.79) 2870,2585 ; v1(2915,2945) 2915,2841.85 U18.3 ; C24.1 2900,2615 2870,2585 ; R49.1@3145,1603.69 ccw(c3129,1603.69) R49.1 3140.31,1560.31 3105,1525 2980,1525 2665,1840 2665,2330 2870,2535 2870,2585
  Top Layer w20: U18.3 2951.34,2805.51 C24.1 2951.34,2541.77 L2.2
  Bottom Layer w10: J4.4 215,1470 280,1535 280,1905 J3.4 205.71,2070.71 cw(c276.42,2000) 276.42,2100 718.58,2100 1030,2411.42 U6.1 ; v1(1491,3081) 1491,3179 1562,3250 2725,3250 2780,3195 2780,3080 v1(2915,2945) ; v1(2680,2600) v1(2810,2600)
VCC24V: C1.2 C2.2 C4.2 C5.2 C6.2 C7.1 C9.2 C10.2 C11.2 C12.2 C13.2 C25.1 C29.2 C30.1 D2.2 D8.2 D9.2 D10.2 D15.2 D17.2 D18.2 D20.2 D22.2 J2.1 J10.1 J11.1 J12.1 J15.2 J16.2 J17.2 J18.2 J19.2 R12.2 U2.4 U3.2 U4.2 U17.7 | length 19036.5
  Top Layer w10: U2.4 3305.2,2575.2 3340,2610 3465,2610 3608,2467 R12.2
  Top Layer w20: U4.2 3490.31,760 C2.2 3844.69,794.68 3845,795 ; U3.2 3515.31,1175 C1.2 3540.31,1200 3845,1200 ; 3840.35,1135.35 3845,1140
  Top Layer w30: C4.2 481.68,3601.64 D8.2 463,3677.68 J10.1 463,4028 475,4040 ; C9.2 672.68,516.64 D15.2 638.59,405.91 J15.2 638.59,56.41 640,55 ; C5.2 867.11,3518.32 cw(c937.82,3589.03) 837.82,3589.03 D9.2 837.82,3905.07 J11.1 871.75,4038.25 870,4040 ; C12.2 1175.18,511.89 D20.2 1136.59,401.41 J18.2 1136.59,58.41 1140,55 ; C6.2 1241.32,3548.86 D10.2 1241.32,3899.82 J12.1 1280.5,4035.5 1285,4040 ; C10.2 1677.68,507.14 D17.2 1634.59,396.91 J16.2 1634.59,60.41 1640,55 ; C13.2 2180.18,502.39 D22.2 2132.59,392.41 J19.2 2132.59,57.59 2130,55 ; C29.2 2464.68,3647.64 D2.2 2464,3735.68 J2.1 2351,4040 1285,4040 ; C11.2 2682.68,497.64 D18.2 2630.59,387.91 J17.2 2630.59,59.41 2635,55 ; U17.7 C25.1@3483.5,1904.69 ; R12.2@3603,2389.65 3603,2183.32 3485,2065.32 C25.1 3490.31,1900 3750,1900 3845,1805 3845,1200 3845,1140 3845,795 3845,505 3395,55 2635,55 ; 475,4040 870,4040 ; 475,4040 425,4040 350,3965 350,3790 310,3750 310,3490 70,3250 70,1155 365,860 365,165 475,55 640,55 ; 640,55 1140,55 ; 870,4040 1285,4040 ; 1140,55 1640,55 ; 1640,55 2130,55 ; 2130,55 2635,55
VDDA: C19.2 C20.2 L1.2 U16.4 | length 481.3
  Top Layer w10: U16.4 2138.49,2461.51 2215,2385 2309.68,2385 C20.2 L1.2
VIN: C14.1 J20.2 J21.2 R12.1 U2.3 | length 1228.2
  Top Layer w10: U2.3 3305.2,2665.2 3305,2665 3305,2660 3335,2630 3567.35,2630 R12.1
  Top Layer w30: R12.1 3610,2672.65 C14.1 3614,2944 J20.2@3614,3549
WS2813_CTRL1: R6.1 U16.26 | length 2093.2
  Top Layer w10: R6.1 1410.31,1765.31 1764,2119 1764,2564 1943.75,2743.75 U16.26
WS2813_CTRL2: R8.1 U16.27 | length 2331.4
  Top Layer w10: R8.1 1179.4,1495.31 1245.09,1561 1523.09,1561 1782,1819.91 1782,2537 1957.25,2712.25 U16.27
ZK1: C4.1 D8.1 J10.2 Q11.3 | length 597.3
  Top Layer w30: Q11.3 542.32,3433.39 C4.1 599.68,3556.36 D8.1 563,3685.68 J10.2
ZK2: C5.1 D9.1 J11.2 Q12.3 | length 597
  Top Layer w30: Q12.3 947.07,3438.99 C5.1 1003.18,3555.11 D9.1 1003.18,3907.57 J11.2
ZK3: C6.1 D10.1 J12.2 Q9.3 | length 596.6
  Top Layer w30: Q9.3 1351.82,3444.6 C6.1 1406.68,3553.86 D10.1 1406.68,3912.82 J12.2
ZKEN1: R26.1 U16.16 | length 2482.1
  Top Layer w8: R26.1 471.69,3118 1616.75,3118 1729.75,3005 v1(1895,3005) ; U16.16 2455.24,2775.24 2500,2820 2500,2850 v1(2445,2905)
  Bottom Layer w8: v1(1895,3005) 2345,3005 v1(2445,2905)
ZKEN2: R27.1 U16.15 | length 2160.7
  Top Layer w8: R27.1 865.69,3134 1623.37,3134 1717.37,3040 v1(1920,3040) ; U16.15 2448.24,2743.75 2525,2820.51 2525,2870 v1(2450,2945)
  Bottom Layer w8: v1(1920,3040) 2355,3040 v1(2450,2945)
ZKEN3: R24.1 U16.14 | length 1847.7
  Top Layer w8: R24.1 1239.69,3150 1630,3150 1705,3075 v1(1945,3075) ; U16.14 2439.37,2712.25 2556.69,2829.57 2556.69,2880 2441.69,2995 v1(2440,2995)
  Bottom Layer w8: v1(1945,3075) 2360,3075 v1(2440,2995)
pads on no net: U17.2

## Polygon pours and split planes (outlines as drawn)
GND on Top Layer "Bottom Layer-No Net" (solid, remove dead copper, pour order 19): 70,1440 70,1200 70,1196.42 ccw(c170,1196.42) 99.29,1125.71 100,1125 330.71,894.29 cw(c260,823.58) 360,823.58 360,680 360,211.42 ccw(c460,211.42) 389.29,140.71 460,70 ccw(c496.21,106.21) 496.21,55 560,55 3373.58,55 ccw(c3373.58,155) 3444.29,84.29 3520,160 3630.71,270.71 ccw(c3560,341.42) 3660,341.42 3660,720 3660,1978.58 cw(c3760,1978.58) 3689.29,2049.29 3820,2180 3890.71,2250.71 ccw(c3820,2321.42) 3920,2321.42 3920,2620 3920,3598.58 ccw(c3820,3598.58) 3890.71,3669.29 3880,3680 3849.29,3710.71 ccw(c3778.58,3640) 3778.58,3740 3720,3740 cw(c3720,3836.57) 3651.72,3768.28 3600,3820 3600,4020 ccw(c3551.72,4020) 3585.86,4054.14 3580,4060 ccw(c3531.72,4011.72) 3531.72,4080 3520,4080 2481.42,4080 ccw(c2481.42,3980) 2410.71,4050.71 2360,4000 2349.29,3989.29 ccw(c2420,3918.58) 2320,3918.58 2320,3840 2320,3481.42 cw(c2220,3481.42) 2290.71,3410.71 2280,3400 cw(c2231.72,3448.28) 2231.72,3380 2120,3380 1561.42,3380 cw(c1561.42,3480) 1490.71,3409.29 1460,3440 1460,3740 1460,4011.72 ccw(c1391.72,4011.72) 1440,4060 1434.14,4065.86 ccw(c1400,4031.72) 1400,4080 441.42,4080 ccw(c441.42,3980) 370.71,4050.71 340,4020 329.29,4009.29 ccw(c400,3938.58) 300,3938.58 300,3880 300,3761.42 cw(c200,3761.42) 270.71,3690.71 220,3640 120,3640 ccw(c120,3591.72) 85.86,3625.86 60,3600 60,3460 60,1220
GND_S on Top Layer "Bottom Layer-No Net" (solid, remove dead copper, pour order 14): 1700,4000 2080,4000 2158.58,4000 cw(c2158.58,3900) 2229.29,3970.71 2240,3960 2250.71,3949.29 cw(c2180,3878.58) 2280,3878.58 2280,3580 2280,3488.28 cw(c2211.72,3488.28) 2260,3440 cw(c2211.72,3488.28) 2211.72,3420 2060,3420 1568.28,3420 cw(c1568.28,3488.28) 1520,3440 cw(c1568.28,3488.28) 1500,3488.28 1500,3880 1500,3931.72 cw(c1568.28,3931.72) 1520,3980 1525.86,3985.86 cw(c1560,3951.72) 1560,4000 1700,4000
M_OUT2 on Top Layer "Bottom Layer-No Net" (solid, remove dead copper, pour order 7): 3224,825 3284.76,825 ccw(c3284.76,835.24) 3292,828 3303.93,839.93 ccw(c3286.86,857) 3311,857 3311,887.93 cw(c3328.07,887.93) 3316,900 3316.98,900.98 cw(c3346,871.96) 3346,913 3361.34,913 cw(c3361.34,899.34) 3371,909 cw(c3351.69,889.69) 3379,889.69 3379,854 3379,803.31 cw(c3351.69,803.31) 3371,784 cw(c3368.59,786.41) 3368.59,783 3347,783 3341.97,783 cw(c3341.97,823.97) 3313,795 ccw(c3310.59,792.59) 3310.59,796 3257,796 3232.41,796 ccw(c3232.41,792.59) 3230,795 cw(c3244.49,809.49) 3224,809.49 3224,826
M_OUT1 on Top Layer "Bottom Layer-No Net" (solid, remove dead copper, pour order 7): 3226,1239 3286.76,1239 ccw(c3286.76,1249.24) 3294,1242 3305.93,1253.93 ccw(c3288.86,1271) 3313,1271 3313,1301.93 cw(c3330.07,1301.93) 3318,1314 3318.98,1314.98 cw(c3348,1285.96) 3348,1327 3363.34,1327 cw(c3363.34,1313.34) 3373,1323 cw(c3353.69,1303.69) 3381,1303.69 3381,1268 3381,1217.31 cw(c3353.69,1217.31) 3373,1198 cw(c3370.59,1200.41) 3370.59,1197 3349,1197 3343.97,1197 cw(c3343.97,1237.97) 3315,1209 ccw(c3312.59,1206.59) 3312.59,1210 3259,1210 3234.41,1210 ccw(c3234.41,1206.59) 3232,1209 cw(c3246.49,1223.49) 3226,1223.49 3226,1240
NetC23_2 on Top Layer "Bottom Layer-No Net" (solid, remove dead copper, pour order 13): 2760,2280 3320.86,2280 cw(c3320.86,2245.86) 3345,2270 3345,2220 3345,2187.07 cw(c3327.93,2187.07) 3340,2175 cw(c3291.72,2223.28) 3291.72,2155 3285,2155 3284.14,2155 ccw(c3284.14,2120.86) 3260,2145 ccw(c3284.14,2120.86) 3250,2120.86 3250,2110 3250,2040 cw(c3189.64,2100.36) 3189.64,2015 3180,2015 3146.21,2015 ccw(c3146.21,1963.79) 3110,2000 ccw(c3134.14,1975.86) 3100,1975.86 3100,1960 3100,1959.14 cw(c3065.86,1959.14) 3090,1935 3030,1935 cw(c3030,1947.07) 3021.46,1938.54 3005,1955 cw(c3041.21,1991.21) 2990,1991.21 2990,2070 2990,2088.79 ccw(c2938.79,2088.79) 2975,2125 ccw(c2950.86,2100.86) 2950.86,2135 2920,2135 2776.21,2135 cw(c2776.21,2186.21) 2740,2150 cw(c2764.14,2174.14) 2730,2174.14 2730,2245 cw(c2766.21,2245) 2740.61,2270.61 2745,2275 cw(c2757.07,2262.93) 2757.07,2280 2760,2280
GND on Bottom Layer "Bottom Layer-No Net" (solid, remove dead copper, pour order 19): 70,1440 70,1200 70,1196.42 ccw(c170,1196.42) 99.29,1125.71 100,1125 330.71,894.29 cw(c260,823.58) 360,823.58 360,680 360,211.42 ccw(c460,211.42) 389.29,140.71 460,70 ccw(c496.21,106.21) 496.21,55 560,55 3373.58,55 ccw(c3373.58,155) 3444.29,84.29 3520,160 3630.71,270.71 ccw(c3560,341.42) 3660,341.42 3660,720 3660,1978.58 cw(c3760,1978.58) 3689.29,2049.29 3820,2180 3890.71,2250.71 ccw(c3820,2321.42) 3920,2321.42 3920,2620 3920,3598.58 ccw(c3820,3598.58) 3890.71,3669.29 3880,3680 3849.29,3710.71 ccw(c3778.58,3640) 3778.58,3740 3720,3740 cw(c3720,3836.57) 3651.72,3768.28 3600,3820 3600,4020 ccw(c3551.72,4020) 3585.86,4054.14 3580,4060 ccw(c3531.72,4011.72) 3531.72,4080 3520,4080 2481.42,4080 ccw(c2481.42,3980) 2410.71,4050.71 2360,4000 2349.29,3989.29 ccw(c2420,3918.58) 2320,3918.58 2320,3840 2320,3481.42 cw(c2220,3481.42) 2290.71,3410.71 2280,3400 cw(c2231.72,3448.28) 2231.72,3380 2120,3380 1561.42,3380 cw(c1561.42,3480) 1490.71,3409.29 1460,3440 1460,3740 1460,4011.72 ccw(c1391.72,4011.72) 1440,4060 1434.14,4065.86 ccw(c1400,4031.72) 1400,4080 441.42,4080 ccw(c441.42,3980) 370.71,4050.71 340,4020 329.29,4009.29 ccw(c400,3938.58) 300,3938.58 300,3880 300,3761.42 cw(c200,3761.42) 270.71,3690.71 220,3640 120,3640 ccw(c120,3591.72) 85.86,3625.86 60,3600 60,3460 60,1220
GND_S on Bottom Layer "Bottom Layer-No Net" (solid, remove dead copper, pour order 14): 1700,4000 2080,4000 2158.58,4000 cw(c2158.58,3900) 2229.29,3970.71 2240,3960 2250.71,3949.29 cw(c2180,3878.58) 2280,3878.58 2280,3580 2280,3488.28 cw(c2211.72,3488.28) 2260,3440 cw(c2211.72,3488.28) 2211.72,3420 2060,3420 1568.28,3420 cw(c1568.28,3488.28) 1520,3440 cw(c1568.28,3488.28) 1500,3488.28 1500,3880 1500,3931.72 cw(c1568.28,3931.72) 1520,3980 1525.86,3985.86 cw(c1560,3951.72) 1560,4000 1700,4000
M_OUT1 on Bottom Layer "Bottom Layer-No Net" (solid, remove dead copper, pour order 12): 3313,1306 3313,1217 ccw(c3329.9,1217) 3317.95,1205.05 3322,1201 ccw(c3334.07,1213.07) 3334.07,1196 3370,1196 3527.58,1196 cw(c3527.58,1096) 3598.29,1166.71 3621,1144 3662.64,1102.36 cw(c3647.27,1087) 3669,1087 3669,1065.31 ccw(c3696.31,1065.31) 3677,1046 ccw(c3691.49,1060.49) 3691.49,1040 3701,1040 3734.93,1040 ccw(c3734.93,1057.07) 3747,1045 ccw(c3739.76,1052.24) 3750,1052.24 3750,1142 3750,1200.58 ccw(c3650,1200.58) 3720.71,1271.29 3710,1282 3688.29,1303.71 ccw(c3617.58,1233) 3617.58,1333 3333,1333 3319.36,1319.36 ccw(c3334.73,1304) 3313,1304
M_OUT2 on Bottom Layer "Bottom Layer-No Net" (solid, remove dead copper, pour order 10): 3314,792 3314,885.86 cw(c3348.14,885.86) 3324,910 cw(c3365.04,868.96) 3365.04,927 3486,927 3548.58,927 ccw(c3548.58,1027) 3619.29,956.29 3642,979 3663.44,1000.44 cw(c3701,962.89) 3701,1016 3732.86,1016 cw(c3732.86,981.86) 3757,1006 cw(c3740.1,989.1) 3764,989.1 3764,943 3764,885.18 cw(c3671.82,885.18) 3737,820 3728.29,811.29 cw(c3657.58,882) 3657.58,782 3343,782 3342.97,782 cw(c3342.97,822.97) 3314,794

## Silkscreen, mask and mechanical layers (free items; w line width, h text height)
Top Overlay:
  text "G" at 3020,3960 h39.37
  text "3" at 1510,3889 h78.74
  text "1" at 700,3880 h78.74
  text "2" at 1080,3880 h78.74
  text "B" at 3020,3880 h39.37
  text "A" at 3020,3800 h39.37
  text "珍珠" at 160,3420 h118.11
  text "24V" at 3560,3120 h39.37
  text "G" at 3780,3120 h39.37
  text "封膜" at 95,2990 h118.11
  text "奶盖" at 120,2160 h78.74
  text "RGB1" at 340,1940 h78.74
  text "MT KEY V2.1" at 835,1740 h78.74
  text "20210715" at 860,1485 h78.74
  text "RGB2" at 80,1000 h78.74
  text "落杯" at 125,815 h157.48
  text "推杆" at 3655,805 h118.11
  text "1" at 880,140 h78.74
  text "2" at 1360,140 h78.74
  text "3" at 1840,140 h78.74
  text "5" at 2860,140 h78.74
  text "4" at 2340,120 h78.74
Top Paste:
  rectangle: 3125,1815 3195,1945
Top Solder:
  rectangle: 3125,1815 3195,1945
Mechanical 1:
  lines w7.87: 0,-5 0,4100 3935,4100 3935,-5 0,-5